# Altium PCB PCB1.PcbDoc
Units mm, origin at the board's own origin, x right, y up, seen from the top; angles counter-clockwise.
Board outline 48 x 48 mm, 2 copper layers (Top Layer, Bottom Layer); 65 components, 55 nets, 250 pads, 93 vias.
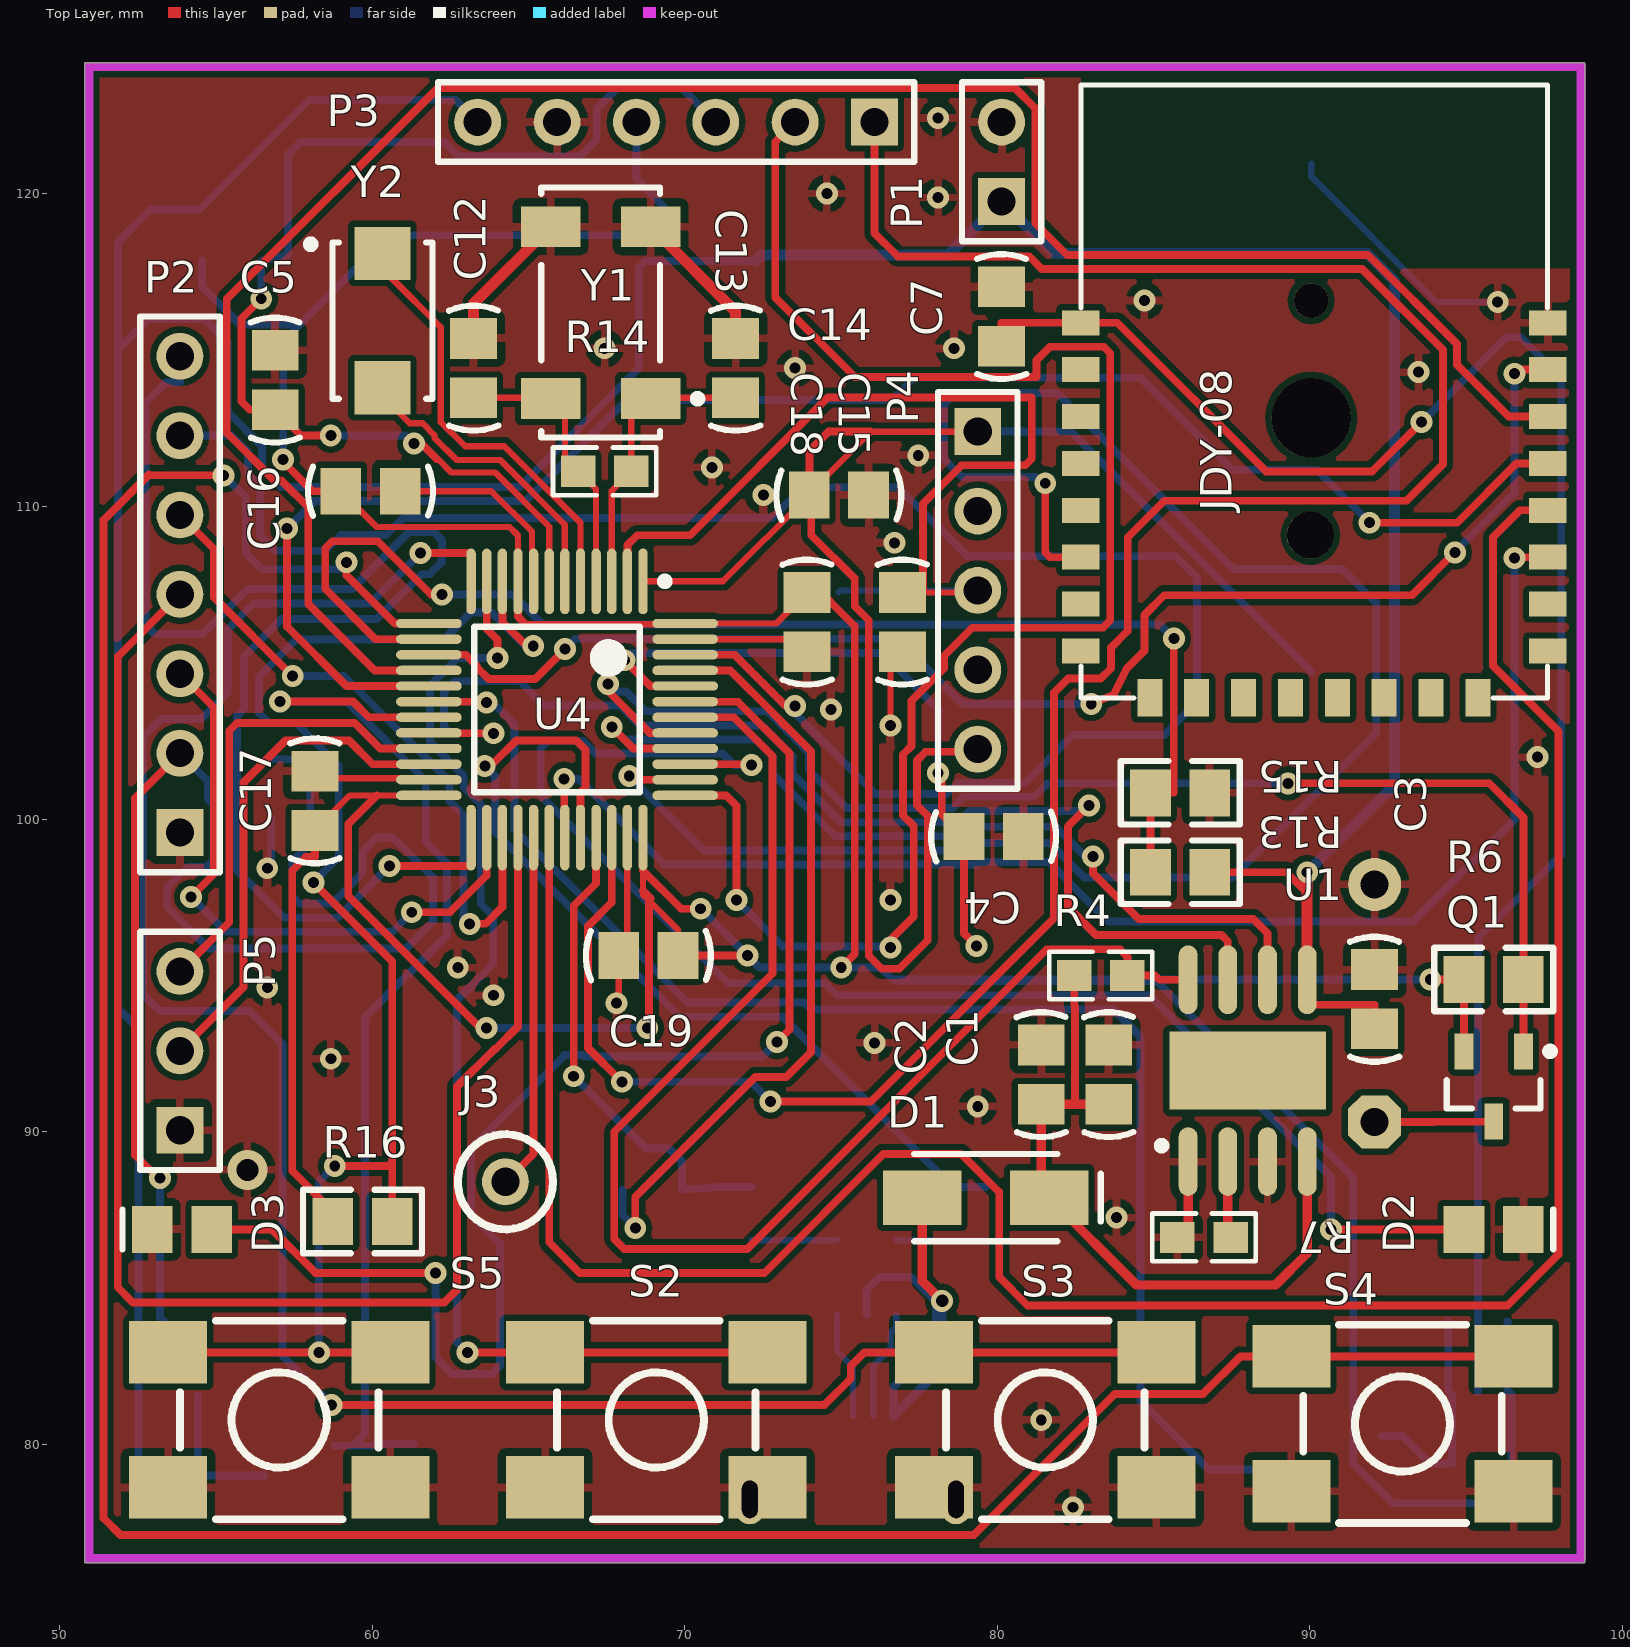
[diagram p0: Top Layer view]
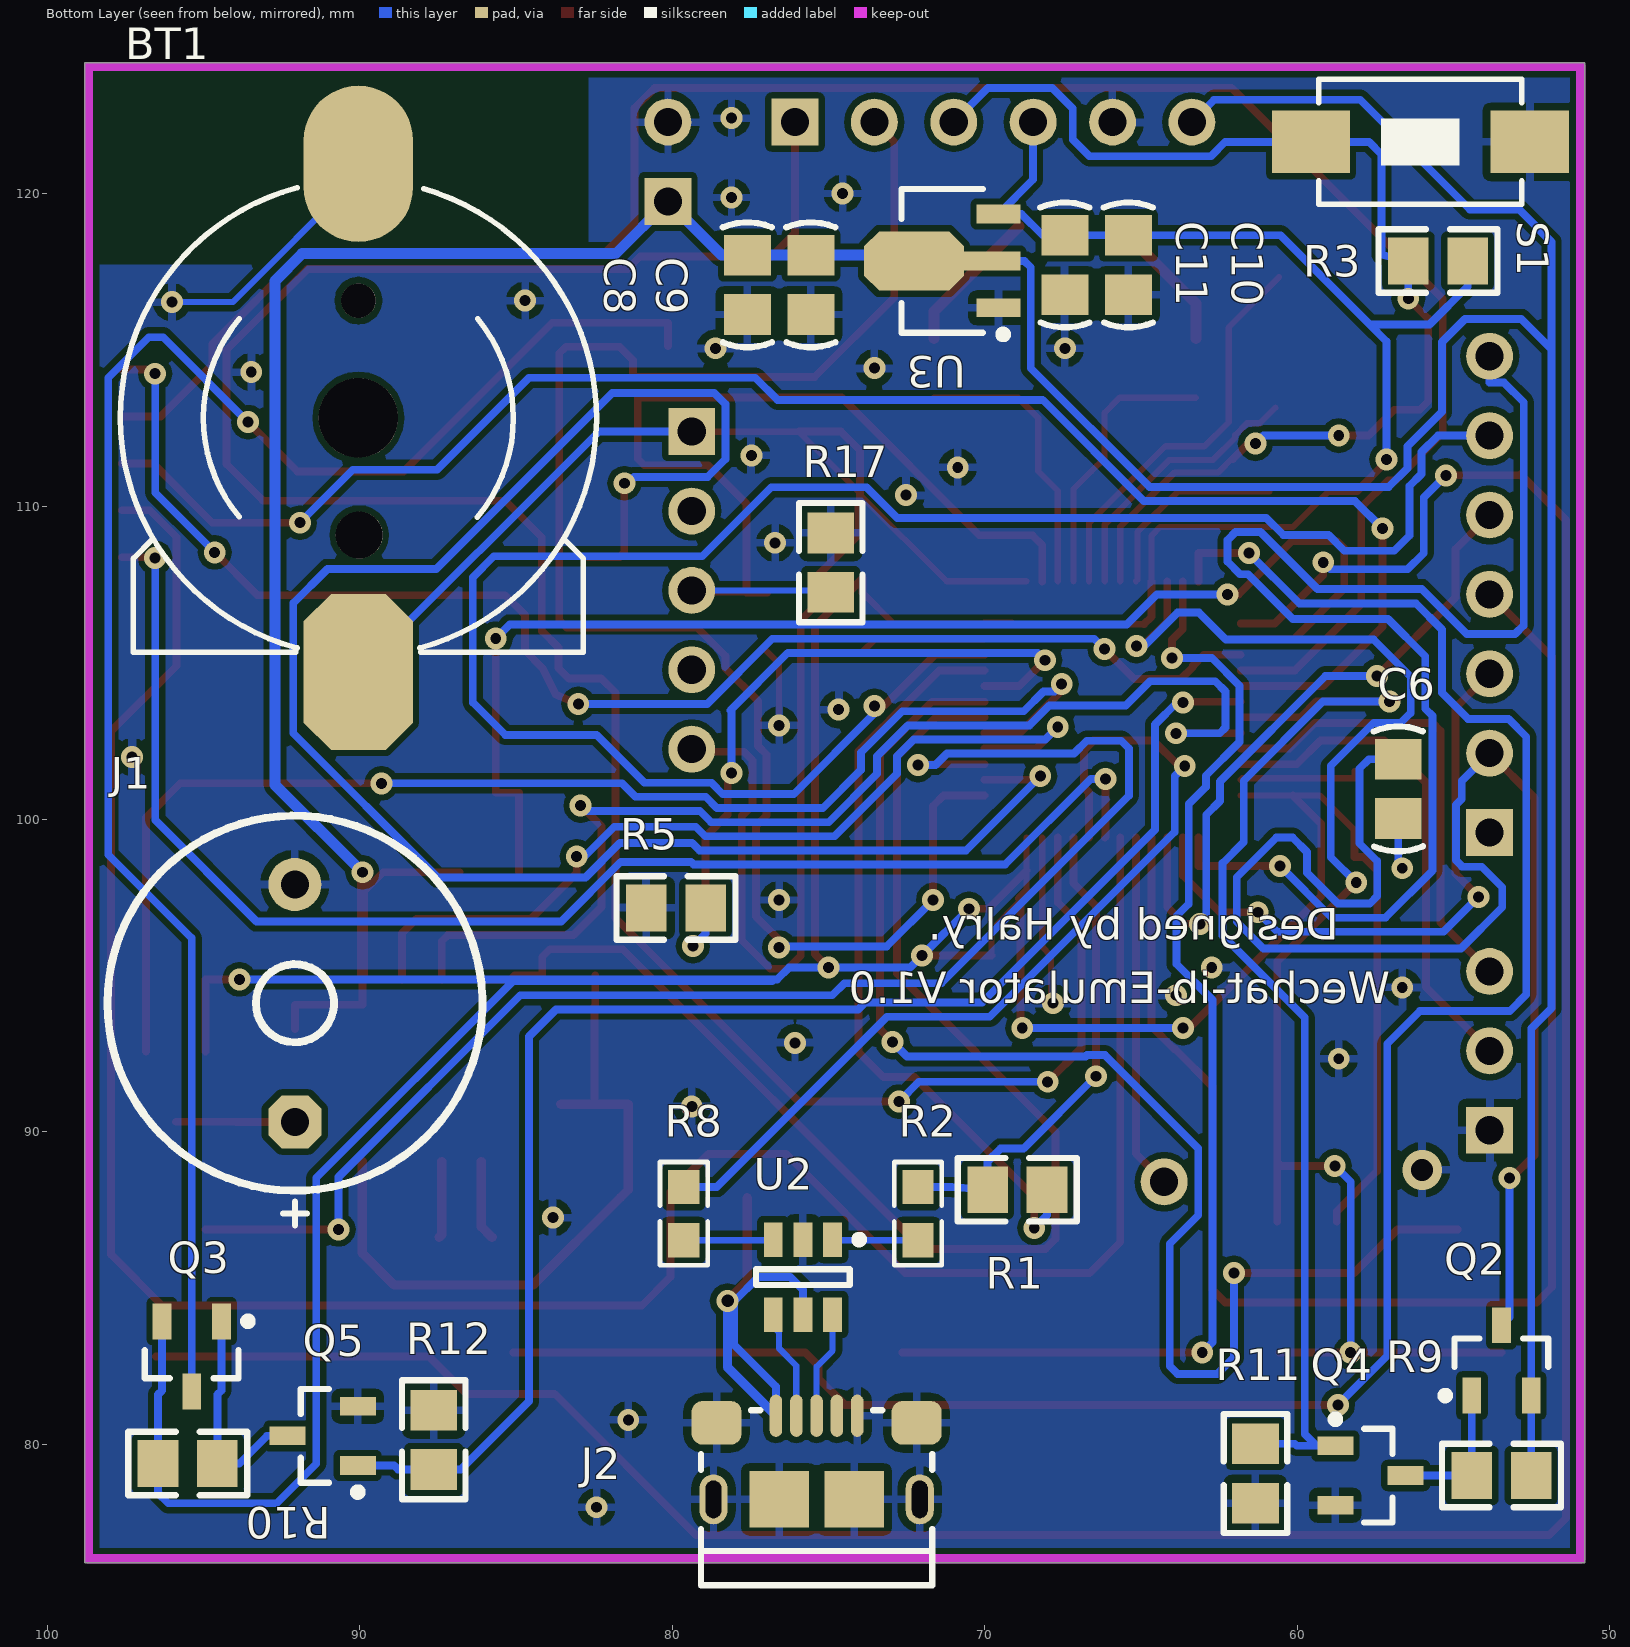
[diagram p1: Bottom Layer view, seen from below]
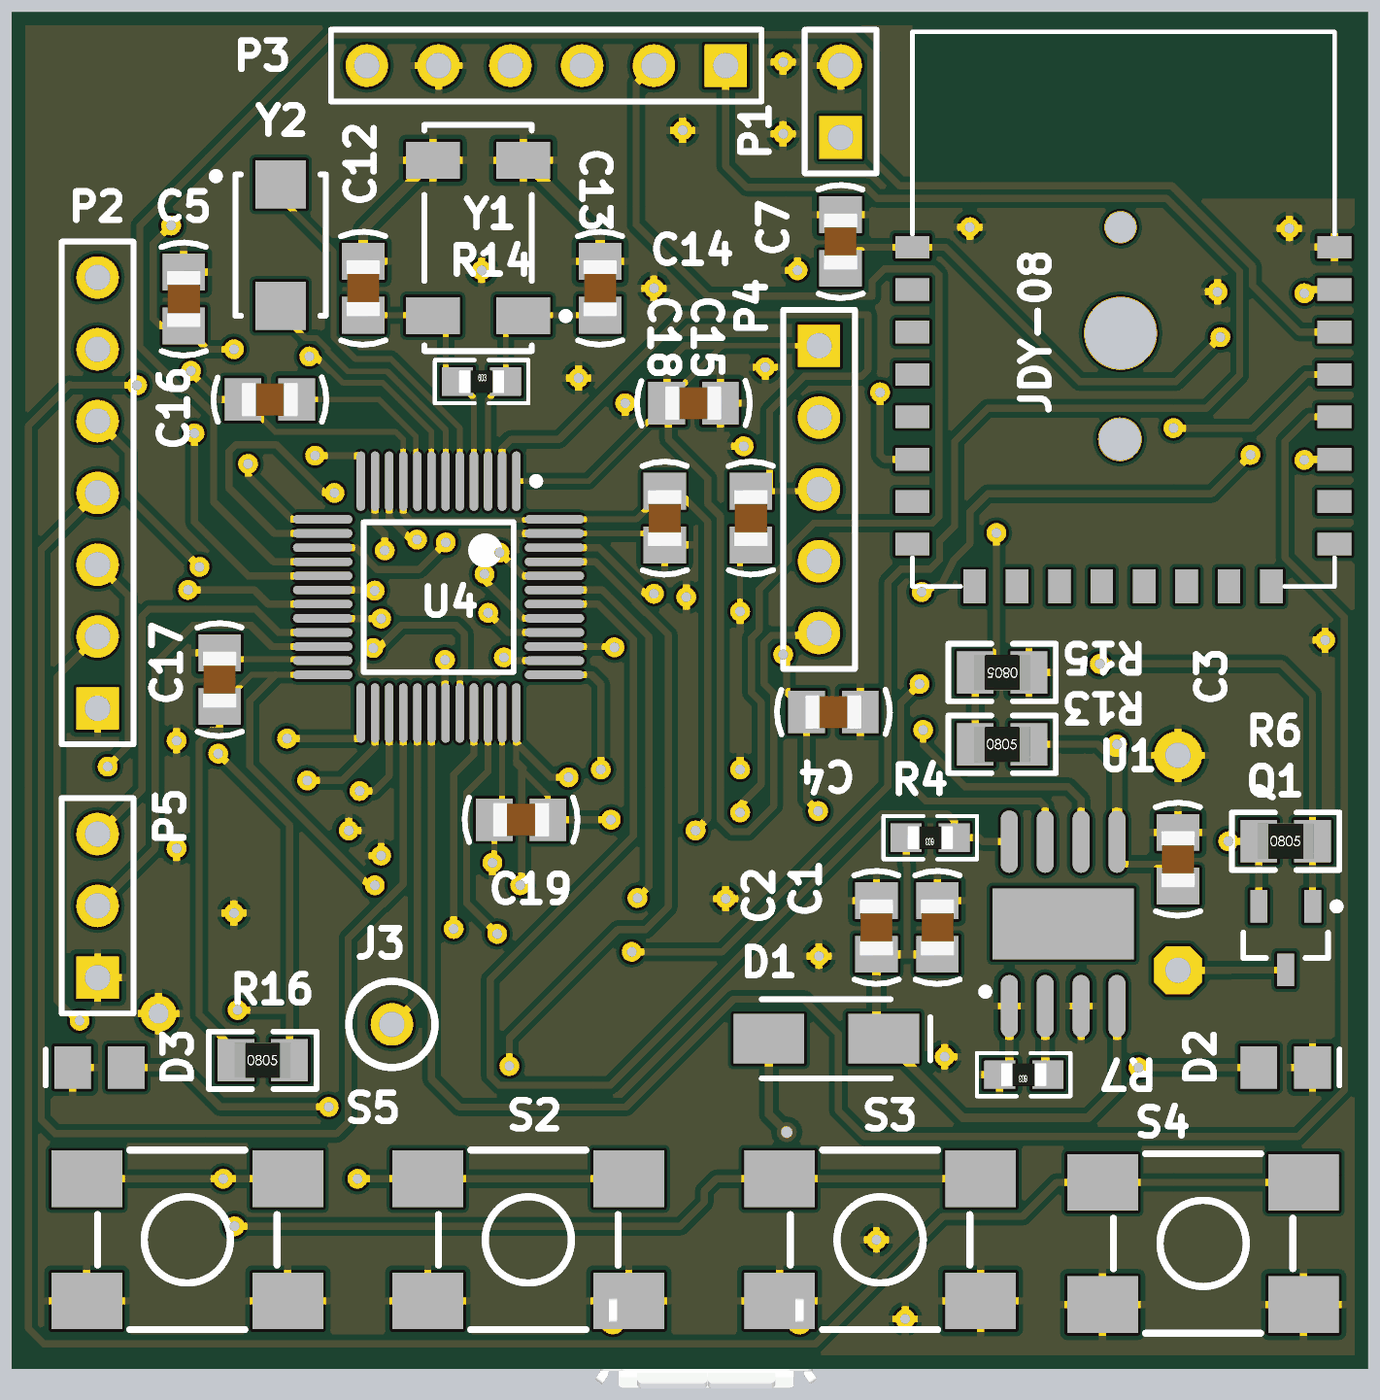
[diagram p2: 3D render of the assembled board from above, using the file's embedded part models]
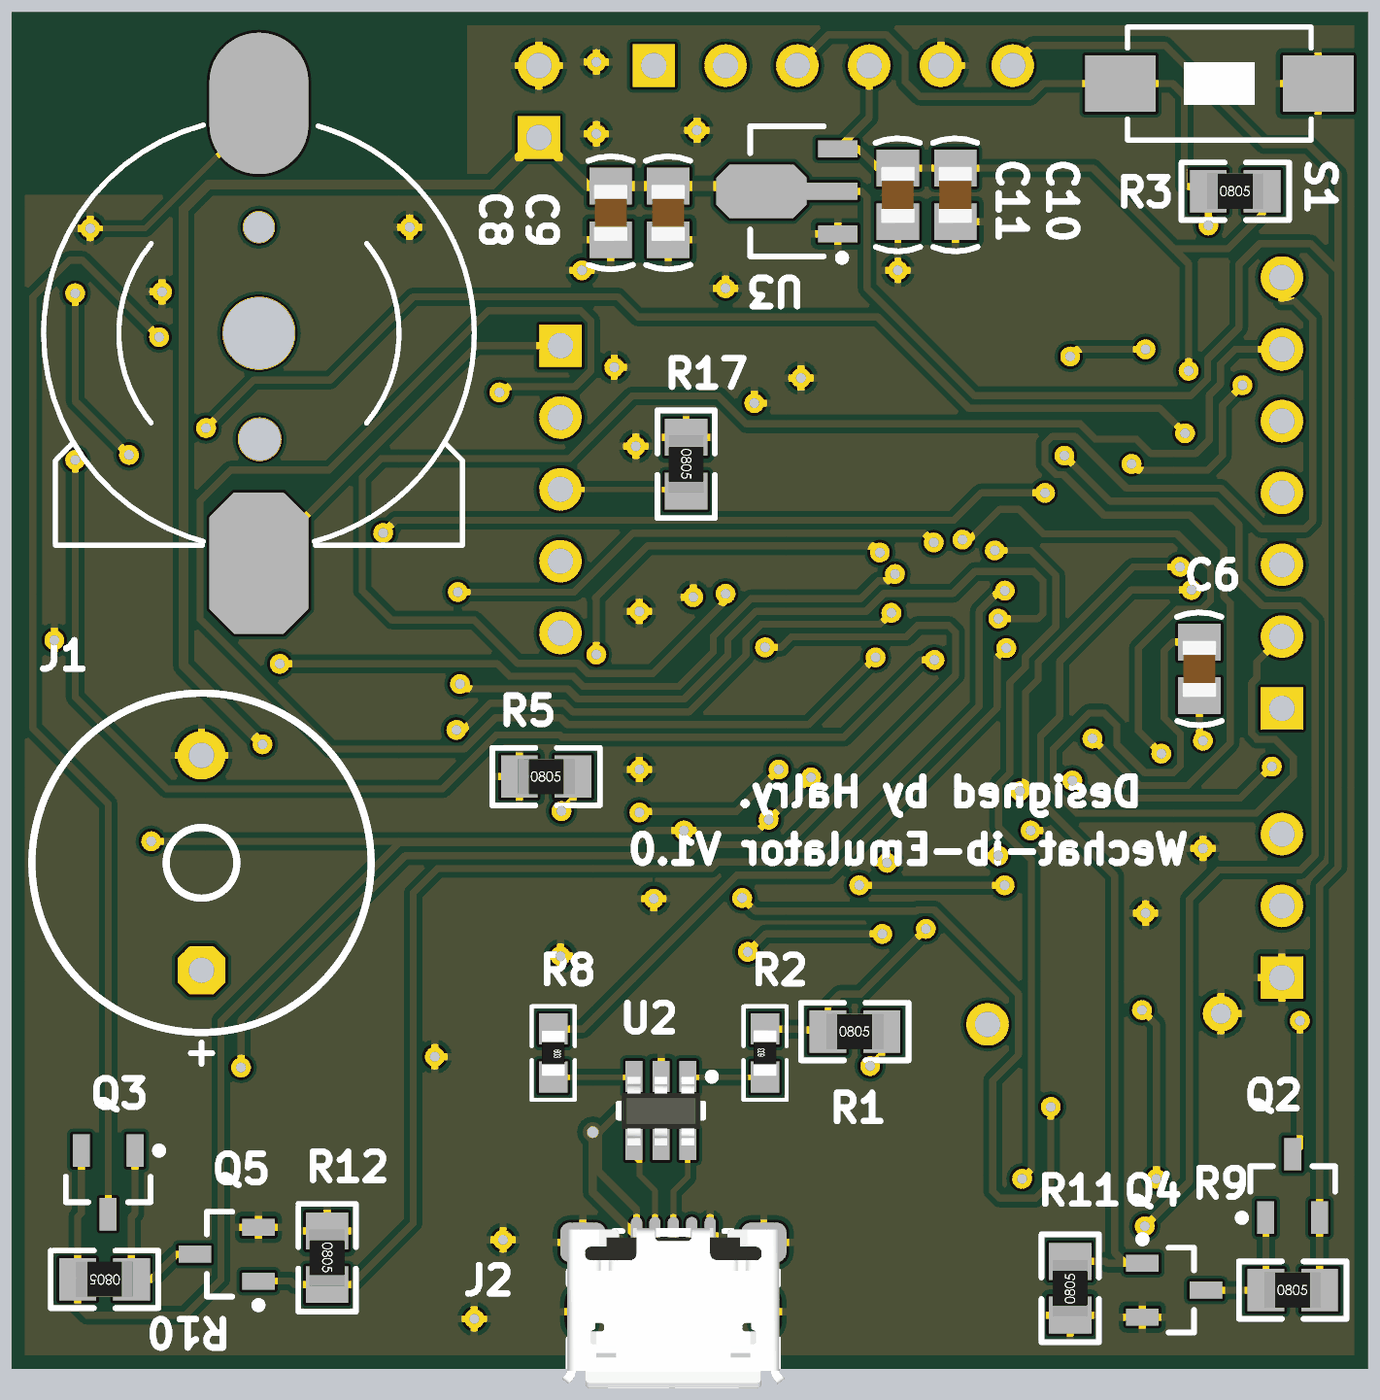
[diagram p3: 3D render of the assembled board from below, using the file's embedded part models]

## Layer stack, top to bottom
Top Solder: solder mask 0.0102, Solder Resist, Dk 3.5
Top Layer: signal copper 0.0356
Dielectric 1: dielectric 0.32, FR-4, Dk 4.8
Bottom Layer: signal copper 0.0356
Bottom Solder: solder mask 0.0102, Solder Resist, Dk 3.5

## Board outline
50.8,76.2 98.8,76.2 98.8,124.2 50.8,124.2

## Design rules (kind name [scope] priority, off if disabled: settings)
Clearance [All] p1: gap=0.2 ignorepadtopadclearanceinfootprint=FALSE
MinimumSolderMaskSliver [All] p1: minsoldermaskwidth=0.15
PolygonConnect [All] p1: connectstyle=Relief reliefconductorwidth=0.254 reliefentries=4 polygonreliefangle="90 Angle" airgapwidth=0.254
RoomDefinition Sheet1 [InComponentClass('Sheet1')] p1: confinementstyle=ConfineIn formatcopy=TRUE lockcomponents=FALSE outline 51.054,76.454 98.552,76.454 98.552,123.952 51.054,123.952
RoutingVias [All] p1: holewidth=0.35 width=0.7 viastyle="Through Hole" minholewidth=0.3 minwidth=0.5 maxholewidth=0.711 maxwidth=1.27
SolderMaskExpansion [All] p1: expansion=0.102
Width [All] p1: maxlimit=0.5 minlimit=0.2 preferedwidth=0.25
29 further rules are at their usual default settings.

## Classes and differential pairs
component class Sheet1: BT1 C1 C2 C3 C4 C5 C6 C7 C8 C9 C10 C11 C12 C13 C14 C15 C16 C17 C18 C19 D1 D2 D3 J1 J2 J3 P1 P2 P3 P4 P5 Q1 Q2 Q3 Q4 Q5 R1 R2 R3 R4 R5 R6 R7 R8 R9 R10 R11 R12 R13 R14 R15 R16 R17 S1 S2 S3 S4 S5

## Components (designator, comment, footprint, x,y, rotation, side; value= is the part's Value field where it differs from the comment)
BT1 "Battery" CR1220 90.043,112.836 r180 bottom
C1 "Cap-S" C-0805 83.566,91.821 r270 top value=100nF
C2 "Cap-S" C-0805 81.407,91.821 r270 top value=100nF
C3 "Cap-S" C-0805 92.075,94.234 r90 top value=100nF
C4 "Cap-S" C-0805 79.883,99.441 r0 top value=100nF
C5 "Cap-S" C-0805 56.896,114.046 r90 top value=100nF
C6 "Cap-S" C-0805 56.769,100.965 r90 bottom value=100nF
C7 "Cap-S" C-0805 80.137,116.078 r270 top value=100nF
C8 "Cap-S" C-0805 77.597,117.094 r90 bottom value=10uF
C9 "Cap-S" C-0805 75.565,117.094 r90 bottom value=100nF
C10 "Cap-S" C-0805 65.405,117.729 r90 bottom value=100nF
C11 "Cap-S" C-0805 67.437,117.729 r90 bottom value=10uf
C12 "Cap-S" C-0805 63.246,114.427 r90 top value=100nF
C13 "Cap-S" C-0805 71.628,114.427 r270 top value=100nF
C14 "Cap-S" C-0805 74.93,110.363 r180 top value=100nF
C15 "Cap-S" C-0805 76.962,106.299 r270 top value=100nF
C16 "Cap-S" C-0805 59.944,110.49 r0 top value=100nF
C17 "Cap-S" C-0805 58.166,100.584 r90 top value=100nF
C18 "Cap-S" C-0805 73.914,106.299 r270 top value=100nF
C19 "Cap-S" C-0805 68.834,95.631 r180 top value=100nF
D1 "1N4148" D-SMA 79.629,87.884 r0 top
D2 "LED0" LED-0805 95.885,86.868 r0 top
D3 "LED0" LED-0805 53.914,86.868 r180 top
J1 "BEEP-S" BEEP-S 92.075,94.107 r90 bottom
J2 "USB Micro" "FCI USB 10118193-0001LF" 75.381,78.282 r0 bottom
J3 "CHECK" CHECK-A 64.262,88.392 r0 top
P1 "Header 2" HDR1X2 80.137,119.761 r90 top
P2 "Header 7" HDR1X7 53.848,99.568 r90 top
P3 "Header 6" HDR1X6 76.073,122.301 r180 top
P4 "Header 5" HDR1X5 79.375,112.395 r270 top
P5 "Header 3" HDR1X3 53.848,90.043 r90 top
Q1 "IRLML5103P" SOT-23_N 95.885,91.44 r270 top
Q2 "IRLML5103P" SOT-23_N 53.467,82.677 r90 bottom
Q3 "IRLML5103P" SOT-23_N 95.377,82.804 r270 bottom
Q4 "IRLML2803N" SOT-23_N 57.658,78.994 r180 bottom
Q5 "IRLML2803N" SOT-23_N 91.186,80.264 r0 bottom
R1 "Res1" 0805-1 68.961,88.138 r180 bottom value=1K
R2 "Res1" 0603-1 72.136,87.376 r90 bottom value=1K
R3 "Res1" 0805-1 55.499,117.856 r180 bottom value=1K
R4 "Res1" 0603-1 83.312,94.996 r180 top value=1K
R5 "Res1" 0805-1 79.883,97.155 r180 bottom value=1K
R6 "Res1" 0805-1 95.885,94.869 r0 top value=1K
R7 "Res1" 0603-1 86.614,86.614 r180 top value=1K
R8 "Res1" 0603-1 79.629,87.376 r270 bottom value=1K
R9 "Res1" 0805-1 53.467,78.994 r180 bottom value=1K
R10 "Res1" 0805-1 95.504,79.375 r0 bottom value=1K
R11 "Res1" 0805-1 61.341,79.06 r90 bottom value=1K
R12 "Res1" 0805-1 87.63,80.137 r270 bottom value=1K
R13 "Res1" 0805-1 85.852,98.298 r0 top value=1K
R14 "Res1" 0603-1 67.437,111.125 r0 top value=1K
R15 "Res1" 0805-1 85.852,100.838 r180 top value=1K
R16 "Res1" 0805-1 59.69,87.122 r0 top value=1K
R17 "Res1" 0805-1 74.93,108.204 r270 bottom value=1K
S1 "SW-PB" SW_PB2_A1 56.007,121.666 r90 bottom
S2 "SW-PB4" SW_PB4_A1 69.088,80.772 r180 top
S3 "SW-PB4" SW_PB4_A1 81.534,80.772 r180 top
S4 "SW-PB4" SW_PB4_A1 92.964,80.645 r180 top
S5 "SW-PB4" SW_PB4_A1 57.023,80.772 r0 top
U1 "TP4056" SOIC-8P 88.011,91.948 r90 top
U2 "USBLC" SOT23-6 75.819,85.344 r270 bottom
U3 "HT7530-1" SOT89N 71.363,117.856 r0 bottom
U4 "STM32F103C" LQFP-48 65.913,103.505 r270 top
Y1 "RSM200S32.768" RSM200S 67.31,116.205 r90 top
Y2 "4SMX" 4SMX 60.325,115.951 r270 top
? "CC2541-MOD" JDY-08 82.677,115.879 r90 top

## Footprints (in the part's own frame and the unit in brackets; to place one, negate y for a bottom-side part, rotate by r counter-clockwise, add the part's x,y. Pads: shape width x height; smd on the part's side, far side on the other; paste and mask are expansions set on the pad)
4SMX [mm] "Surface Mount Quartz Crystal; Body 5.2 x 3.4 mm (LxW max)"
  rect 1.7x1.8 smd: 1(-2.15,0) 2(2.15,0)
  silkscreen extent -2.57,-2.42 2.5,1.6
0603-1 [mm] "0603带丝印"
  rect 1.1x1 smd: 1(-0.85,0) 2(0.85,0)
  silkscreen extent -1.65,-0.76 1.65,0.76, body extent -0.8,-0.4 0.8,0.4, height 0.3
0805-1 [mm] "0805带丝印"
  rect 1.3x1.5 smd: 1(-0.95,0) 2(0.95,0)
  silkscreen extent -1.91,-1.02 1.91,1.02, body extent -1,-0.62 1,0.63, height 0.5
BEEP-S [mm] "有源蜂鸣器"
  oct 1.7x1.7 hole 0.9: 1(-3.8,0)
  round 1.7 hole 0.9: 2(3.8,0)
  silkscreen extent -7.11,-6 6,6
C-0805 [mm] "贴片电容"
  rect 1.3x1.5 smd: 1(-0.95,0) 2(0.95,0)
  silkscreen extent -2,-0.79 2,0.79, body extent -1,-0.6 1,0.6, height 0.95
CHECK-A [mm] "测试点"
  round 1.5 hole 0.9: 1(0,0)
  silkscreen extent -1.52,-1.52 1.52,1.52
CR1220 [mm] "钮扣电池"
  round 2.54 hole 2.54: 0(0,0)
  round 1.1 hole 1.1: 0(0,3.75)
  round 1.5 hole 1.5: 0(0.025,-3.75)
  oct 3.5x5 smd: 1(0,-8.128)
  oval 3.5x5 smd: 2(0,8.128)
  silkscreen extent -7.62,-7.5 7.62,7.36
D-SMA [mm] "贴片二极管"
  rect 2.5x1.75 smd: 1(-2.032,0) 2(2.032,0)
  silkscreen extent -2.29,-1.4 3.68,1.4
"FCI USB 10118193-0001LF" [mm] "USB 2.0 Type B Micro"
  oval 0.4x1.35 smd: 1(1.3,-2.625) 2(0.65,-2.625) 3(0,-2.625) 4(-0.65,-2.625) 5(-1.3,-2.625)
  oval 0.9x1.6 hole 0.5 slot 1.2 at 90 deg: S(-3.3,0.05) S(3.3,0.05)
  rrect50% 1.6x1.4 smd: S(-3.2,-2.4) S(3.2,-2.4)
  rect 1.9x1.8 smd: S(-1.2,0.05) S(1.2,0.05)
  silkscreen extent -3.7,-2.8 3.7,2.8, body extent -3.93,-2.9 3.93,2.76, height 2.78
HDR1X2 [mm] "Connector; Header; 2 Position"
  rect 1.5x1.5 hole 0.9: 1(0,0)
  round 1.5 hole 0.9: 2(2.54,0)
  silkscreen extent -1.27,-1.27 3.81,1.27
HDR1X3 [mm] "Connector; Header; 3 Position"
  rect 1.5x1.5 hole 0.9: 1(0,0)
  round 1.5 hole 0.9: 2(2.54,0) 3(5.08,0)
  silkscreen extent -1.27,-1.27 6.35,1.27
HDR1X5 [mm] "Connector; Header; 5 Position"
  rect 1.5x1.5 hole 0.9: 1(0,0)
  round 1.5 hole 0.9: 2(2.54,0) 3(5.08,0) 4(7.62,0) 5(10.16,0)
  silkscreen extent -1.27,-1.27 11.43,1.27
HDR1X6 [mm] "Connector; Header; 6 Position"
  rect 1.5x1.5 hole 0.9: 1(0,0)
  round 1.5 hole 0.9: 2(2.54,0) 3(5.08,0) 4(7.62,0) 5(10.16,0) 6(12.7,0)
  silkscreen extent -1.27,-1.27 13.97,1.27
HDR1X7 [mm] "Connector; Header; 7 Position"
  rect 1.5x1.5 hole 0.9: 1(0,0)
  round 1.5 hole 0.9: 2(2.54,0) 3(5.08,0) 4(7.62,0) 5(10.16,0) 6(12.7,0) 7(15.24,0)
  silkscreen extent -1.27,-1.27 16.51,1.27
JDY-08 [mm]
  rect 0.8x1.2 smd: 1(0,0) 2(-1.5,0) 3(-3,0) 4(-4.5,0) 5(-6,0) 6(-7.5,0) 7(-9,0) 8(-10.5,0) 17(-10.5,-14.935) 18(-9,-14.935) 19(-7.5,-14.935) 20(-6,-14.935) 21(-4.5,-14.935) 22(-3,-14.935) 23(-1.5,-14.935) 24(0,-14.935)
  rect 1.2x0.8 smd: 9(-12,-2.202) 10(-12,-3.702) 11(-12,-5.202) 12(-12,-6.702) 13(-12,-8.202) 14(-12,-9.702) 15(-12,-11.202) 16(-12,-12.702)
  silkscreen extent -12,-14.94 7.61,0
LED-0805 [mm] "贴片LED"
  rect 1.3x1.5 smd: 1(-0.95,0) 2(0.95,0)
  silkscreen extent 1.91,-0.64 1.91,0.64
LQFP-48 [mm] "LQFP"
  oval 2.1x0.3 smd: 1(-4.1,2.75) 2(-4.1,2.25) 3(-4.1,1.75) 4(-4.1,1.25) 5(-4.1,0.75) 6(-4.1,0.25) 7(-4.1,-0.25) 8(-4.1,-0.75) 9(-4.1,-1.25) 10(-4.1,-1.75) 11(-4.1,-2.25) 12(-4.1,-2.75) 25(4.1,-2.75) 26(4.1,-2.25) 27(4.1,-1.75) 28(4.1,-1.25) 29(4.1,-0.75) 30(4.1,-0.25) 31(4.1,0.25) 32(4.1,0.75) 33(4.1,1.25) 34(4.1,1.75) 35(4.1,2.25) 36(4.1,2.75)
  oval 0.3x2.1 smd: 13(-2.75,-4.1) 14(-2.25,-4.1) 15(-1.75,-4.1) 16(-1.25,-4.1) 17(-0.75,-4.1) 18(-0.25,-4.1) 19(0.25,-4.1) 20(0.75,-4.1) 21(1.25,-4.1) 22(1.75,-4.1) 23(2.25,-4.1) 24(2.75,-4.1) 37(2.75,4.1) 38(2.25,4.1) 39(1.75,4.1) 40(1.25,4.1) 41(0.75,4.1) 42(0.25,4.1) 43(-0.25,4.1) 44(-0.75,4.1) 45(-1.25,4.1) 46(-1.75,4.1) 47(-2.25,4.1) 48(-2.75,4.1)
  silkscreen extent -4.22,-2.65 2.65,3.57, body extent -3.5,-3.5 3.5,3.5, height 1.6
RSM200S [mm] "Crystal, SM; 4 Leads; Body 8 x 3.8 x 2.5 mm (LxWxH)"
  rect 1.3x1.9 smd: 1(-2.75,-1.6) 2(2.75,-1.6) 3(2.75,1.6) 4(-2.75,1.6)
  silkscreen extent -4,-3.22 4,1.9
SOIC-8P [mm]
  oval 2.2x0.6 smd: 1(-2.908,1.905) 2(-2.908,0.635) 3(-2.908,-0.635) 4(-2.908,-1.905) 5(2.908,-1.905) 6(2.908,-0.635) 7(2.908,0.635) 8(2.908,1.905)
  rect 2.5x5 smd: 9(0,0)
  silkscreen extent -2.52,2.63 -2.28,2.88
SOT23-6 [mm] "Max4173"
  rect 1.1x0.6 smd: 1(-1.2,0.95) 2(-1.2,0) 3(-1.2,-0.95) 4(1.2,-0.95) 5(1.2,0) 6(1.2,0.95)
  silkscreen extent -1.32,-1.5 0.25,1.92, body extent -1.19,-1.4 1.23,1.4, height 1.08
SOT89N [mm] "SOT89, 3-Leads, Body 4.5x2.4 mm, Pitch 1.5mm, Lead Span 4.1mm, IPC Medium Density"
  rect 1.4x0.6 smd: 1(-1.8,1.5) 3(-1.8,-1.5)
  rect 1.8x0.6 smd: 2(-1.6,0)
  oct 3.2x1.9 smd: 2(0.9,0)
  silkscreen extent -2.07,-2.3 1.3,2.47, body extent -1.3,-2.3 1.3,2.3, height 1.6
SOT-23_N [mm] "SOT23, 3-Leads, Body 2.9x1.3mm, Pitch 0.95mm, Lead Span 2.3mm, IPC Medium Density"
  rect 1.15x0.6 smd: 1(-1.125,0.95) 2(-1.125,-0.95) 3(1.125,0)
  silkscreen extent -1.25,-1.5 0.7,1.93, body extent -0.7,-1.5 0.7,1.5, height 1.11
SW_PB2_A1 [mm]
  rect 2x2.5 smd: 1(0,3.556) 2(0,-3.444)
  silkscreen extent -2,-3.19 2,3.31, body extent -1.93,-3.94 1.92,3.95, height 2.5
SW_PB4_A1 [mm]
  rect 2.5x2 smd: 1(-3.556,2.159) 2(-3.556,-2.159) 3(3.556,-2.159) 4(3.556,2.159)
  silkscreen extent -3.17,-3.18 3.17,3.18, body extent -3.18,-3.18 3.18,3.18, height 6

## Part data
BT1: "备份电池", LatestRevisionDate=17-Jul-2002, LatestRevisionNote="Re-released for DXP Platform.", PackageReference=BAT-2, Published=24-Mar-1999, Publisher="Altium Limited"
C1 C2 C3 C4 C5 C6 C7 C8 C9 C10 C11 C12 C13 C14 C15 C16 C17 C18 C19: "贴片瓷片电容", LatestRevisionDate=17-Jul-2002, LatestRevisionNote="Re-released for DXP Platform.", PackageReference=RAD-0.3, Published=8-Jun-2000, Publisher="Altium Limited"
D1: library part Diode, "二极管", PackageDocument=Sep-1996, Code_JEDEC=DO-214-AB, LatestRevisionDate=17-Jul-2002, LatestRevisionNote="Re-released for DXP Platform.", PackageReference=SMC, Published=8-Jun-2000, Publisher="Altium Limited"
D2 D3: "发光二极管", LatestRevisionDate=08-Jul-2005, LatestRevisionNote="Mech Layer 1 removed.", PackageReference=LED-0, Published=8-Jun-2000, Publisher="Altium Limited"
J1: "有源蜂鸣器"
J2: library part "USB 2.0 Type B Micro"
J3: "测试点"
P1: "Header, 2-Pin", LatestRevisionDate=17-Jul-2002, LatestRevisionNote="Re-released for DXP Platform.", Publisher="Altium Limited"
P2: "Header, 7-Pin", LatestRevisionDate=17-Jul-2002, LatestRevisionNote="Re-released for DXP Platform.", Publisher="Altium Limited"
P3: "Header, 6-Pin", LatestRevisionDate=17-Jul-2002, LatestRevisionNote="Re-released for DXP Platform.", Publisher="Altium Limited"
P4: "Header, 5-Pin", LatestRevisionDate=17-Jul-2002, LatestRevisionNote="Re-released for DXP Platform.", Publisher="Altium Limited"
P5: "Header, 3-Pin", LatestRevisionDate=17-Jul-2002, LatestRevisionNote="Re-released for DXP Platform.", Publisher="Altium Limited"
Q1 Q2 Q3: library part IRLML5103, "HEXFET Power MOSFET", ComponentLink1Description="Manufacturer Link", ComponentLink1URL=http://www.irf.com/, ComponentLink2Description=Datasheet, ComponentLink2URL=http://www.irf.com/product-info/datasheets/data/irlml5103.pdf, DatasheetVersion=Aug-1997, LatestRevisionDate=20-Nov-2009, LatestRevisionNote="IPC-7351 Footprint Added.", PackageDescription="3-Pin SOT-23 Package 0.95 mm Pitch, 2.3 mm Lead Span", PackageReference=SOT-23, Published=8-Jun-2000, Publisher="Altium Limited"
Q4 Q5: library part IRLML2803, "HEXFET Power MOSFET", ComponentLink1Description="Manufacturer Link", ComponentLink1URL=http://www.irf.com/, ComponentLink2Description=Datasheet, ComponentLink2URL=http://www.irf.com/product-info/datasheets/data/irlml2803.pdf, DatasheetVersion=Aug-1997, LatestRevisionDate=20-Nov-2009, LatestRevisionNote="IPC-7351 Footprint Added.", PackageDescription="3-Pin SOT-23 Package 0.95 mm Pitch, 2.3 mm Lead Span", PackageReference=SOT-23, Published=8-Jun-2000, Publisher="Altium Limited"
R1 R2 R3 R4 R5 R6 R7 R8 R9 R10 R11 R12 R13 R14 R15 R16 R17: "贴片电阻", LatestRevisionDate=17-Jul-2002, LatestRevisionNote="Re-released for DXP Platform.", PackageReference=AXIAL-0.4, Published=8-Jun-2000, Publisher="Altium Limited"
S1 S2 S3 S4 S5: "微动开关", LatestRevisionDate=17-Jul-2002, LatestRevisionNote="Re-released for DXP Platform.", PackageReference=SPST-2, Published=24-Mar-1999, Publisher="Altium Limited"
U1: "锂电池充电管理"
U2: library part TPS3808, "DSP电源管理"
U3: "3.0V 100mA Low Power,  Low Dropout Voltage (LDO) Regulator", Code_IPC=SOT89, ComponentLink1Description="Manufacturer Link", ComponentLink1URL=http://www.holtek.com/, ComponentLink2Description=Datasheet, ComponentLink2URL=http://www.holtek.com/pdf/consumer/75xx_1v150.pdf, DatasheetVersion="rev1.50, Jan-2006", PackageDescription="3-Pin SOT-89 Package 1.5 mm Pitch, 4.1 mm Lead Span", PackageReference=SOT-89, PackageVersion=Jan-2006, Published=30-Mar-2007, Publisher="Altium Limited"
U4: "STM32单片机48引脚"
Y1: "Surface Mount Tuning Fork Crystal Unit", ComponentLink1Description="Manufacturer Link", ComponentLink1URL=http://www.raltron.com/products/microcrystals/default.asp, ComponentLink2Description=Datasheet, ComponentLink2URL=http://www.raltron.com/products/pdfspecs/crystal_rsm200s.pdf, DatasheetDocument=28-Sep-1998, LatestRevisionDate=17-Jul-2002, LatestRevisionNote="Re-released for DXP Platform.", PackageReference=RSM200S, Published=8-Jun-2000, Publisher="Altium Limited"
Y2: "Surface Mount Quartz Crystal", PackageDocument=9-Sep-1999, ComponentLink1Description="Manufacturer Link", ComponentLink1URL=http://www.cmac.com/mt/, DatasheetDocument=9-Sep-1999, Note="PCB layout complies with manufacturer's recommendation.", PackageReference=4SMX, Published=17-Jul-2002, Publisher="Altium Limited"

## Via types
v1: diameter 0.7, hole 0.35, Top Layer to Bottom Layer, 91 vias
v2: diameter 1.27, hole 0.711, Top Layer to Bottom Layer, 1 vias
v3: diameter 0.7, hole 0.4, Top Layer to Bottom Layer, tented both sides, 1 vias

## Nets (pads, with @x,y where several pads share a name; then routed paths per layer and width w, separated by ;. In a path a pad name is that pad's centre, name@x,y a point inside that pad or via, vN(x,y) a via of type N, cw(c..) or ccw(c..) an arc to the next point about the centre after c; other vN are vias at no path point)
GND: ?.24 BT1.2 C1.1 C2.1 C3.2 C4.2 C5.2 C6.1 C7.1 C8.1 C9.1 C10.1 C11.1 C12.2 C13.1 C14.1 C15.2 C16.2 C17.2 C18.2 C19.2 D2.2 D3.2 J1.2 J2.5 J2.S P1.2 P2.1 P3.5 P5.1 Q4.2 Q5.2 R5.1 R7.2 R11.1 R12.1 R15.1 R17.1 S1.2 S2.1 S2.4 S3.1 S3.4 S4.1 S4.4 S5.2 S5.3 U1.1 U1.3 U2.2 U3.1 U4.8 U4.23 U4.35 U4.47 Y1.2 Y1.3 | length 43.8
  Top Layer w0.2: C17.2 58.166,101.305 61.763,101.305 U4.23 ; C16.2 63.812,110.49 65.113,109.189 65.113,107.655 U4.8 ; v1(67.818,94.107) 67.884,94.173 C19.2 68.163,95.91 U4.35 ; U4.47 73.508,105.755 C18.2 ; v1(76.581,102.997) 76.581,104.968 C15.2
  Top Layer w0.3: R7.2 86.106,86.956 U1.1
  Top Layer w0.35: C12.2 63.246,116.491 Y1.3 ; Y1.2 71.628,116.237 C13.1
  Bottom Layer w0.2: BT1.2 90.043,120.56 94.061,116.542 v1(96.012,116.542)
  Bottom Layer w0.25: v1(56.642,98.425) 56.769,98.552 C6.1
  other v1: 82.423,77.978 81.407,80.772 83.82,87.249 79.375,90.805 58.674,92.329 76.073,92.837 63.881,94.361 56.642,94.615 62.738,95.25 76.581,97.409 97.282,101.981 74.676,103.505 76.708,108.839 72.517,110.363 70.866,111.252 77.47,111.633 93.472,114.3 73.533,114.427 67.437,115.062 78.613,115.062 84.709,116.586 78.105,119.888 74.549,120.015 78.105,122.428
  other v2: 56.007,88.773
Net_1: ?.1 C7.2 Q3.3 | length 56.5
  Top Layer w0.25: C7.2 80.137,115.879 ?.1 83.841,115.879 88.595,111.125 91.999,111.125 v1(93.574,112.7)
  Bottom Layer w0.25: v1(93.574,112.7) 96.291,115.418 96.749,115.418 98.044,114.122 98.044,98.857 95.377,96.19 Q3.3
Net_6: ?.6 U4.38 | length 58.9
  Top Layer w0.25: v1(68.224,101.371) 68.341,101.255 U4.38 ; v1(81.534,110.744) 81.534,108.531 81.686,108.379 ?.6
  Bottom Layer w0.25: v1(68.224,101.371) 70.598,98.998 79.13,98.998 79.37,99.238 81.672,99.238 82.778,98.131 87.514,98.131 92.126,102.743 92.126,106.909 91.034,108.001 87.554,108.001 81.921,113.634 78.654,113.634 78.3,113.28 78.3,111.51 78.863,110.947 81.226,110.947 81.407,110.767 81.415,110.775 81.447,110.744 v1(81.534,110.744)
Net_19: ?.19 U4.31 | length 45.1
  Top Layer w0.25: v1(66.142,101.283) 66.142,99.426 U4.31 ; v1(96.545,108.356) 96.568,108.379 ?.19
  Bottom Layer w0.25: v1(66.142,101.283) 66.611,101.283 69.346,98.548 79.317,98.548 79.397,98.628 81.645,98.628 83.55,96.723 93.301,96.723 96.545,99.967 v1(96.545,108.356)
Net_20: ?.20 U4.30 | length 77.4
  Top Layer w0.25: U4.30 65.663,86.458 66.65,85.471 72.542,85.471 76.352,89.281 78.842,89.281 80.061,88.062 80.061,85.344 80.975,84.43 96.317,84.43 97.957,86.07 97.957,102.805 95.86,104.902 95.86,109.015 96.723,109.879 ?.20
Net_21: ?.21 U4.17 | length 53.5
  Top Layer w0.25: v1(57.277,109.296) 57.277,106.153 59.175,104.255 U4.17 ; v1(91.915,109.482) 94.717,109.482 96.614,111.379 ?.21
  Bottom Layer w0.25: v1(57.277,109.296) 58.159,110.178 64.916,110.178 68.15,113.411 76.632,113.411 77.343,114.122 84.582,114.122 87.528,111.176 90.221,111.176 v1(91.915,109.482)
Net_22: ?.22 U4.16 | length 67.7
  Top Layer w0.25: U4.16 60.078,104.755 57.952,106.881 57.952,109.971 57.092,110.831 56.87,110.831 55.347,112.355 55.347,116.637 62.103,123.393 80.565,123.393 81.212,122.746 81.212,119.067 82.227,118.052 91.855,118.052 94.709,115.198 94.709,114.536 96.366,112.879 ?.22
Net_23: ?.23 U4.15 | length 45
  Top Layer w0.25: U4.15 62.992,105.255 63.333,104.914 63.333,104.876 63.728,104.481 65.213,104.481 v1(66.167,105.435) ; v1(83.007,103.683) 83.718,103.979 84.15,104.826 84.709,105.385 84.709,106.528 85.344,107.163 93.269,107.163 v1(94.64,108.534) ; v1(96.545,114.249) 96.675,114.379 ?.23
  Bottom Layer w0.25: v1(66.167,105.435) 66.497,105.766 76.801,105.766 78.884,103.683 v1(83.007,103.683) ; v1(94.64,108.534) 96.545,110.439 v1(96.545,114.249)
NetBT1_1: BT1.1 C14.2 P4.1 P4.5 U4.1 | length 56.2
  Top Layer w0.2: U4.1 71.222,107.605 C14.2 73.98,110.429 75.946,112.395 P4.1@80.01,112.395
  Top Layer w0.25: 75.946,112.395 74.6,112.395 73.99,111.785 73.99,110.16 74.049,110.101 74.049,109.085 75.437,107.697 75.437,106.809 75.887,106.359 75.887,95.624 76.301,95.21 76.861,95.21 77.775,96.124 77.775,100.095 77.43,100.439 77.43,101.874 77.706,102.15 79.29,102.15 P4.5
  Bottom Layer w0.25: P4.1@80.01,112.395 82.356,112.395 BT1.1
NetC1_2: C1.2 C2.2 D1.2 R4.2 U1.4 | length 23.2
  Top Layer w0.25: C2.2 82.491,90.871 82.491,94.002 82.462,94.031 R4.2
  Top Layer w0.3: C1.2 C2.2 81.407,88.138 D1.2 84.455,85.09 88.9,85.09 89.916,86.106 U1.4
NetC4_1: C4.1 R5.2 U4.44 | length 22.8
  Top Layer w0.25: v1(68.072,105.08) 68.897,104.255 U4.44 ; v1(78.105,101.473) 78.151,101.473 78.225,101.547 78.225,100.149 C4.1 78.933,96.342 v1(79.339,95.936)
  Bottom Layer w0.25: v1(68.072,105.08) 68.308,105.316 76.301,105.316 78.141,103.475 78.105,103.439 v1(78.105,101.473) ; R5.2 78.933,96.342 v1(79.339,95.936)
NetC5_1: C5.1 P3.3 R3.1 S1.1 U4.7 | length 38.1
  Top Layer w0.2: 62.081,111.54 62.534,111.087 63.931,111.087 65.663,109.355 U4.7
  Top Layer w0.25: v1(56.449,116.647) 55.813,116.011 55.813,113.366 56.083,113.096 C5.1 57.724,112.268 v1(58.674,112.268) ; v1(61.341,112.014) 61.571,112.014 62.063,111.522
  Bottom Layer w0.25: v1(56.449,116.647) R3.1 57.302,118.059 57.302,121.26 57.709,121.666 S1.1 62.306,121.666 62.763,121.209 66.65,121.209 67.183,121.742 67.183,122.733 67.843,123.393 69.901,123.393 P3.3 ; v1(58.674,112.268) 61.087,112.268 v1(61.341,112.014)
NetC6_2: C6.2 P2.2 Q2.3 | length 48.6
  Top Layer w0.25: v1(53.213,88.519) 53.137,88.519 52.412,89.244 52.412,100.672 P2.2
  Bottom Layer w0.25: v1(53.213,88.519) 53.213,84.056 Q2.3 ; P2.2 54.737,101.219 54.737,100.639 54.923,100.453 54.923,98.683 54.737,98.497 54.737,98.476 54.098,98.476 53.442,97.819 53.442,97.18 54.762,95.86 61.087,95.86 61.94,96.712 61.94,98.139 60.673,99.405 60.147,99.405 59.69,98.948 59.69,98.283 58.699,97.293 57.683,97.293 57.44,97.536 57.44,98.654 58.014,99.227 58.014,101.61 57.709,101.915 C6.2
NetC10_2: C10.2 C11.2 C16.1 C17.1 C18.1 C19.1 P3.4 Q1.2 Q3.2 R3.2 R6.1 R10.2 R16.1 U3.3 U4.9 U4.24 U4.36 U4.48 | length 171.6
  Top Layer w0.2: C17.1 59.287,100.755 60.147,100.755 U4.24 ; C16.1 60.137,109.347 64.389,109.347 64.663,109.073 U4.9 ; 64.91,106.23 U4.48@69.114,106.23 ; U4.36 68.663,98.349 68.663,97.707 68.663,97.58 68.859,97.384 69.784,96.459 C19.1 ; U4.48 72.92,106.255 C18.1
  Top Layer w0.25: v1(57.15,111.506) 57.15,111.43 58.09,110.49 C16.1 ; C17.1 58.166,98.781 57.872,98.781 57.44,98.349 57.44,88.742 58.74,87.443 R16.1 ; 60.147,100.755 59.233,99.841 59.233,97.536 63.456,93.312 v1(63.66,93.312) ; U4.9 64.663,106.477 64.91,106.23 ; 68.663,97.707 68.91,97.46 68.859,97.409 68.859,97.384 68.859,93.37 v1(68.801,93.312) ; 68.663,98.349 69.882,97.13 v1(70.51,97.13) ; U4.48@69.114,106.23 69.139,106.255 U4.48 ; C19.1 v1(72.009,95.631) ; C18.1 73.914,107.696 75.437,106.173 75.437,95.681 v1(75.006,95.25) ; v1(93.853,94.869) R6.1 Q1.2
  Bottom Layer w0.25: R3.2 54.549,117.043 55.768,115.824 57.683,115.824 ; v1(57.15,111.506) 57.15,115.291 57.683,115.824 ; v1(63.66,93.312) v1(68.801,93.312) ; P3.4 68.453,120.466 U3.3 68.825,119.356 68.148,118.679 C11.2 C10.2 60.538,118.679 57.683,115.824 ; v1(70.51,97.13) v1(72.009,95.631) 72.39,95.25 v1(75.006,95.25) 76.261,95.25 76.642,94.869 76.751,94.869 ; v1(93.853,94.869) 76.751,94.869 ; Q3.2 96.327,81.712 96.454,81.585 R10.2 96.454,78.435 96.124,78.105 92.659,78.105 91.389,79.375 91.389,88.519 85.097,94.811 76.809,94.811 76.751,94.869
NetC12_1: C12.1 R14.1 U4.4 Y1.4 | length 8.9
  Top Layer w0.2: C12.1 65.688,113.477 Y1.4 66.167,112.998 66.167,111.545 R14.1 67.163,110.549 U4.4
NetC13_2: C13.2 R14.2 U4.3 Y1.1 | length 9.1
  Top Layer w0.2: U4.3 67.663,110.501 R14.2 68.287,112.832 Y1.1 68.932,113.477 C13.2
NetC15_1: C15.1 P4.3 R17.2 U4.2 | length 33.8
  Top Layer w0.2: C15.1 79.944,107.249 P4.3@80.01,107.315
  Top Layer w0.25: U4.2 68.163,108.767 68.478,109.082 70.175,109.082 74.58,113.487 81.102,113.487 81.102,111.528 80.895,111.32 78.859,111.32 77.622,110.084 77.622,107.249 C15.1
  Bottom Layer w0.2: R17.2 74.991,107.315 P4.3@80.01,107.315
NetD1_1: D1.1 J2.1 U2.5 | length 15.6
  Top Layer w0.3: D1.1 77.597,85.217 v3(78.232,84.582)
  Bottom Layer w0.25: U2.5 75.819,84.938 76.225,85.344 77.243,85.344 78.029,84.558 78.029,83.187 76.681,81.839 J2.1
  Bottom Layer w0.3: J2.1 78.232,82.458 v3(78.232,84.582)
NetD2_1: D2.1 U4.39 | length 47.1
  Top Layer w0.25: U4.39 72.108,101.755 v1(72.136,101.727) ; v1(90.678,86.868) D2.1
  Bottom Layer w0.25: v1(72.136,101.727) 71.577,101.727 71.207,102.097 67.147,102.097 66.74,102.504 65.634,102.504 65.39,102.26 65.39,100.747 71.389,94.748 74.491,94.748 74.879,94.361 84.861,94.361 90.678,88.544 v1(90.678,86.868)
NetD3_1: D3.1 U4.43 | length 44.8
  Top Layer w0.25: D3.1 56.794,86.868 58.189,85.474 v1(62.027,85.474) ; U4.43 71.699,103.755 73.355,102.099 73.355,93.269 v1(72.949,92.862)
  Bottom Layer w0.25: v1(62.027,85.474) 62.027,82.779 62.56,82.245 63.83,82.245 64.084,82.499 64.084,86.411 63.17,87.325 63.17,89.459 66.156,92.445 66.726,92.445 66.768,92.403 72.489,92.403 v1(72.949,92.862)
NetJ1_1: J1.1 Q1.3 | length 3.8
  Top Layer w0.25: J1.1 93.955,90.307 93.963,90.315 Q1.3
NetJ2_2: J2.2 U2.4 | length 3.5
  Bottom Layer w0.2: J2.2 76.031,82.508 76.581,83.058 76.581,83.566 76.769,83.754 U2.4
NetJ2_3: J2.3 U2.6 | length 3.4
  Bottom Layer w0.2: U2.6 74.869,82.992 75.381,82.48 J2.3
NetJ3_1: J3.1 U4.29 | length 11.4
  Top Layer w0.25: J3.1 65.163,89.293 U4.29
NetP2_3: P2.3 U4.26 | length 19.8
  Top Layer w0.25: P2.3 54.94,103.556 54.94,98.247 v1(54.204,97.511) ; v1(61.265,97.017) 62.484,97.017 63.663,98.196 U4.26
  Bottom Layer w0.25: v1(54.204,97.511) 55.322,96.393 60.64,96.393 v1(61.265,97.017)
NetP2_4: P2.4 U4.28 | length 49.5
  Top Layer w0.25: P2.4 51.856,105.196 51.856,85.018 52.342,84.531 62.306,84.531 62.713,84.938 62.713,91.44 63.91,92.637 63.939,92.637 64.663,93.361 U4.28
NetP2_5: P2.5 U4.27 | length 21.5
  Top Layer w0.25: P2.5 54.94,108.636 54.94,107.086 v1(57.455,104.572) ; v1(63.119,96.647) 63.627,96.647 64.163,97.183 U4.27
  Bottom Layer w0.25: v1(57.455,104.572) 59.106,104.572 62.477,101.201 62.477,100.577 62.916,100.137 62.916,96.647 v1(63.119,96.647)
NetP2_6: P2.6 U4.46 | length 61
  Top Layer w0.25: U4.46 71.592,105.255 73.225,103.622 v1(73.533,103.622)
  Bottom Layer w0.25: P2.6 55.499,112.268 56.025,111.742 56.025,111.04 56.413,110.652 56.413,109.068 56.896,108.585 58.496,108.585 59.004,109.093 60.451,109.093 60.991,109.634 72.804,109.634 73.787,110.617 76.835,110.617 79.045,108.407 85.707,108.407 86.385,107.729 86.385,103.734 85.344,102.692 82.423,102.692 80.891,101.16 79.18,101.16 ; v1(73.533,103.622) 73.533,103.378 76.113,100.798 78.385,100.798 78.747,101.16 79.18,101.16
NetP2_7: P2.7 U4.25 | length 45.3
  Top Layer w0.25: v1(60.554,98.501) 63.163,98.501 U4.25
  Bottom Layer w0.25: P2.7 53.848,113.97 53.391,113.97 52.756,113.335 52.756,106.197 53.035,105.918 54.581,105.918 56.021,107.359 59.353,107.359 61.178,109.184 61.976,109.184 62.23,108.93 62.23,108.229 61.834,107.834 61.58,107.834 60.147,106.401 57.099,106.401 55.905,105.207 55.905,103.53 55.677,103.302 55.677,98.349 57.183,96.843 58.895,96.843 v1(60.554,98.501)
NetP3_1: P3.1 U4.34 | length 76.9
  Top Layer w0.25: U4.34 67.663,97.333 66.904,96.573 66.904,92.676 v1(67.987,91.592) ; v1(72.746,90.957) 75.946,90.957 81.813,96.825 81.813,104.038 82.271,104.496 83.312,104.496 83.642,104.826 83.642,105.486 84.176,106.02 84.176,109.017 85.344,110.185 93.091,110.185 94.259,111.354 94.259,115.011 91.669,117.602 81.423,117.602 81.022,118.003 76.815,118.003 76.073,118.745 P3.1
  Bottom Layer w0.25: v1(67.987,91.592) 72.111,91.592 v1(72.746,90.957)
NetP3_2: P3.2 U4.37 | length 53.5
  Top Layer w0.25: U4.37 71.323,100.755 71.653,100.425 v1(71.653,97.409) ; P3.2 72.898,121.666 72.898,116.688 75.438,114.148 81.255,114.148 81.255,114.681 81.686,115.113 83.403,115.113 83.617,114.899 83.617,106.359 83.379,106.121 79.201,106.121 78.3,105.22 78.3,104.827 77.256,103.783 77.256,102.336 76.98,102.06 76.98,100.121 77.325,99.776 77.325,96.883 76.581,96.139 v1(76.581,95.885)
  Bottom Layer w0.25: v1(71.653,97.409) 73.137,95.925 76.541,95.925 v1(76.581,95.885)
NetP5_2: P5.2 U4.22 | length 16.2
  Top Layer w0.25: P5.2 55.88,94.615 55.88,101.168 57.226,102.514 59.258,102.514 60.018,101.755 U4.22
NetP5_3: P5.3 U4.21 | length 15.2
  Top Layer w0.25: P5.3 55.423,96.698 55.423,102.822 55.677,103.076 59.433,103.076 60.254,102.255 U4.21
NetQ1_1: Q1.1 R6.2 U4.41 | length 42.8
  Top Layer w0.25: v1(67.539,104.318) 67.539,104.101 68.885,102.755 U4.41 ; v1(89.306,101.143) 95.743,101.143 96.835,100.051 R6.2 Q1.1
  Bottom Layer w0.25: v1(67.539,104.318) 67.774,104.082 68.121,104.082 68.756,103.447 72.643,103.447 73.965,102.125 73.965,101.567 75.184,100.348 78.571,100.348 78.933,100.71 81.177,100.71 81.61,101.143 v1(89.306,101.143)
NetQ2_1: Q2.1 Q4.3 R9.1 | length 4.7
  Bottom Layer w0.25: Q2.1 R9.1 Q4.3
NetQ3_1: Q3.1 Q5.3 R10.1 | length 7.2
  Bottom Layer w0.25: Q5.3 92.964,80.264 93.853,79.375 R10.1 94.554,81.585 94.427,81.712 Q3.1
NetQ4_1: Q4.1 R11.2 U4.19 | length 36.1
  Top Layer w0.25: v1(57.048,103.759) 59.387,103.759 59.891,103.255 U4.19
  Bottom Layer w0.25: v1(57.048,103.759) 59.182,103.759 61.713,101.228 61.713,99.265 62.39,98.589 62.39,96.273 59.765,93.648 59.765,80.324 59.385,79.944 ; Q4.1 59.385,79.944 ; R11.2 60.086,80.01 60.02,79.944 59.385,79.944
NetQ5_1: Q5.1 R12.2 U4.18 | length 47.3
  Top Layer w0.25: U4.18 63.631,103.755 v1(63.652,103.734)
  Bottom Layer w0.25: v1(63.652,103.734) 63.845,103.734 64.556,103.023 64.556,99.658 70.08,94.134 73.818,94.134 74.048,93.904 83.718,93.904 84.582,93.04 84.582,81.371 86.766,79.187 R12.2 88.773,79.187 88.9,79.314 Q5.1
NetR1_1: R1.1 R2.2 U4.33 | length 15.7
  Top Layer w0.25: v1(66.446,91.77) 66.446,97.226 67.163,97.942 U4.33
  Bottom Layer w0.25: v1(66.446,91.77) 68.758,89.459 69.494,89.459 69.911,89.042 R1.1 71.056,88.226 R2.2
NetR1_2: R1.2 U4.45 | length 24.7
  Top Layer w0.25: v1(68.417,86.919) 68.417,87.906 72.259,91.747 73.246,91.747 74.041,92.542 74.041,102.17 73.264,102.947 73.253,102.947 72.858,103.342 72.858,103.353 71.456,104.755 U4.45
  Bottom Layer w0.25: R1.2 68.011,87.325 v1(68.417,86.919)
NetR2_1: R2.1 U2.1 | length 2.7
  Bottom Layer w0.2: R2.1 74.851,86.526 U2.1
NetR4_1: R4.1 U1.8 U4.42 | length 44.1
  Top Layer w0.25: U4.42 71.563,103.255 72.811,102.007 72.811,95.061 67.742,89.992 67.742,86.563 68.061,86.244 71.994,86.244 81.585,95.834 83.922,95.834 84.162,95.594 R4.1 85.039,94.996 85.179,94.856 U1.8
NetR7_1: R7.1 U1.2 | length 2.5
  Top Layer w0.3: U1.2 87.376,86.702 R7.1
NetR8_1: R8.1 U4.32 | length 29.2
  Top Layer w0.25: v1(63.602,101.702) 63.794,101.702 64.607,102.514 66.523,102.514 66.827,102.21 66.827,101.014 66.663,100.849 U4.32
  Bottom Layer w0.25: v1(63.602,101.702) 63.925,101.379 63.925,99.59 69.839,93.675 73.127,93.675 78.576,88.226 R8.1
NetR8_2: R8.2 U2.3 | length 2.9
  Bottom Layer w0.2: U2.3 76.787,86.526 R8.2
NetR13_1: R13.1 R15.2 U4.14 | length 42
  Top Layer w0.25: U4.14 60.107,105.755 58.496,107.366 58.496,108.661 58.725,108.89 60.174,108.89 61.876,107.188 v1(62.23,107.188) ; R13.1 R15.2 85.649,100.838 v1(85.649,105.773)
  Bottom Layer w0.25: v1(62.23,107.188) 64.492,107.188 65.457,106.223 85.199,106.223 v1(85.649,105.773)
NetR16_2: R16.2 S5.1 S5.4 U4.10 | length 48.2
  Top Layer w0.25: S5.1 v1(58.293,82.931) S5.4 ; v1(58.115,97.968) 60.64,95.443 60.64,89.027 ; v1(58.801,88.9) 60.513,88.9 60.64,89.027 ; R16.2 60.64,89.027 ; U4.10 64.163,106.316 64.942,105.537 v1(65.151,105.537)
  Bottom Layer w0.25: v1(58.115,97.968) 58.928,98.781 58.928,101.702 57.553,103.076 56.693,103.076 56.373,103.396 56.373,104.557 57.557,105.741 62.28,105.741 63.144,106.605 63.832,106.605 64.9,105.537 v1(65.151,105.537) ; v1(58.293,82.931) 58.293,88.392 v1(58.801,88.9)
NetS2_2: S2.2 S2.3 U4.11 | length 37.5
  Top Layer w0.25: v1(63.043,82.931) S2.3 S2.2 ; U4.11 63.663,106.081 64.008,105.736 v1(64.008,105.156)
  Bottom Layer w0.25: v1(63.043,82.931) 62.713,83.261 62.713,94.209 63.87,95.366 63.87,96.89 63.475,97.286 63.475,100.479 62.927,101.027 62.927,101.387 61.849,102.465 61.849,104.267 62.738,105.156 v1(64.008,105.156)
NetS3_2: S3.2 S3.3 U4.12 | length 67.9
  Top Layer w0.25: v1(58.699,81.255) 74.473,81.255 75.311,82.093 75.311,82.499 75.743,82.931 S3.3 S3.2 ; v1(61.544,108.509) 63.163,108.509 U4.12
  Bottom Layer w0.25: v1(58.699,81.255) 57.125,82.829 57.125,92.812 56.083,93.853 53.205,93.853 52.672,94.386 52.672,102.634 53.238,103.2 54.534,103.2 55.372,104.038 55.372,106.064 56.208,106.899 59.935,106.899 v1(61.544,108.509)
NetS4_2: S4.2 S4.3 U4.13 | length 94.1
  Top Layer w0.25: v1(55.245,110.998) 52.883,110.998 52.857,111.023 51.404,109.57 51.404,77.628 51.943,77.089 79.248,77.089 83.765,81.606 86.584,81.606 87.782,82.804 S4.3 S4.2 ; v1(59.171,108.215) 59.171,107.808 60.725,106.255 U4.13
  Bottom Layer w0.25: v1(55.245,110.998) 55.955,110.288 55.955,108.509 56.474,107.99 58.946,107.99 v1(59.171,108.215)
NetU1_6: U1.6 U4.40 | length 28.7
  Top Layer w0.25: v1(67.666,102.946) 68.357,102.255 U4.40 ; v1(83.058,98.806) 83.058,98.273 84.531,96.799 88.189,96.799 88.646,96.342 U1.6
  Bottom Layer w0.25: v1(67.666,102.946) 68.065,102.547 72.27,102.547 72.811,102.006 72.811,101.448 74.811,99.448 78.944,99.448 79.251,99.755 81.855,99.755 82.804,98.806 v1(83.058,98.806)
NetU1_7: U1.7 U4.20 | length 38.4
  Top Layer w0.25: U4.20 61.825,102.743 v1(63.881,102.743) ; v1(82.931,100.432) 82.263,99.764 82.263,97.188 83.16,96.291 87.173,96.291 87.376,96.088 U1.7
  Bottom Layer w0.25: v1(63.881,102.743) 62.484,102.743 62.299,102.928 62.299,104.081 62.627,104.409 64.716,104.409 65.493,103.632 67.934,103.632 68.569,102.997 72.457,102.997 73.448,102.006 73.448,101.448 74.997,99.898 78.757,99.898 79.119,100.26 82.759,100.26 v1(82.931,100.432)
NetU4_5: U4.5 Y2.1 | length 13
  Top Layer w0.2: Y2.1@60.583,117.344 62.196,115.731 62.196,112.703 62.97,111.928 64.221,111.928 66.663,109.486 U4.5
NetU4_6: U4.6 Y2.2 | length 8.9
  Top Layer w0.2: Y2.2@60.702,113.161 61.199,112.664 61.61,112.664 61.991,112.283 61.991,112.195 62.699,111.487 64.096,111.487 66.163,109.42 U4.6
VCC: C3.1 C8.2 C9.2 P1.1 P3.6 Q2.2 R9.2 R13.2 U1.5 U3.2 | length 138.8
  Top Layer w0.25: R13.2 89.247,98.298 89.916,97.629 U1.5 89.916,94.056 92.075,94.056 C3.1
  Top Layer w0.35: U1.5 v1(89.916,98.298)
  Bottom Layer w0.25: R9.2 Q2.2 52.517,93.299 51.867,93.95 51.867,115.037 ; P3.6 62.662,123.012 57.988,123.012 54.483,119.507 52.908,119.507 51.867,118.466 51.867,115.037 ; U3.2@72.263,117.856 69.763,117.856 68.732,117.856 68.529,117.653 68.529,114.427 64.73,110.628 57.074,110.628 56.475,111.226 56.475,111.928 55.372,113.031 55.372,115.265 54.635,116.002 52.832,116.002 51.867,115.037
  Bottom Layer w0.35: U3.2@72.263,117.856 72.451,118.044 C9.2 C8.2 78.42,118.044 P1.1 81.809,118.089 91.842,118.089 92.71,117.221 92.71,101.092 v1(89.916,98.298)
pads on no net: ?.2 ?.3 ?.4 ?.5 ?.7 ?.8 ?.9 ?.10 ?.11 ?.12 ?.13 ?.14 ?.15 ?.16 ?.17 ?.18 BT1.0 J2.4 P4.2 P4.4 U1.9

## Polygon pours and split planes (outlines as drawn)
GND on Top Layer "GND_L01_P004" (solid, pour order 4): 50.927,124.079 82.677,124.079 82.677,117.729 82.804,117.602 98.679,117.602 98.679,76.454 50.927,76.454
GND on Bottom Layer "GND_L02_P006" (solid, pour order 6): 50.927,124.079 82.804,124.079 82.677,123.952 82.677,117.729 98.679,117.729 98.679,76.327 50.927,76.327

## Keep-outs
Keep-Out Layer:
  lines w0.3: 50.927,76.327 50.927,124.079 98.679,124.079 98.679,76.327 50.927,76.327

## Silkscreen, mask and mechanical layers (free items; w line width, h text height)
Bottom Overlay:
  text "Designed by Halry." at 58.674,96.139 h1
  text "Wechat-ib-Emulator V1.0" at 57.023,94.107 h1
Drill Drawing:
  text ".LEGEND" at 103.88,81.28 h1.52
  text "Drill Drawing." at 103.88,78.74 h1.52

## Dimensions
50.927,76.327 to 50.927,124.079 on Mechanical 1
50.927,76.327 to 98.679,76.327 on Mechanical 1

## Text inside footprints (layer, text, board x,y; h text height)
?: Top Overlay "JDY-08" at 87.503,109.855 h1 r90